# Altium PCB micromouse-PCB.PcbDoc
Units mil, origin at the board's own origin, x right, y up, seen from the top; angles counter-clockwise.
Board outline 4010 x 2775 mil, 2 copper layers (Top Layer, Bottom Layer); 8 components, 9 nets, 23 pads, 0 vias.
Unrouted connection lines stored in the file: 6.
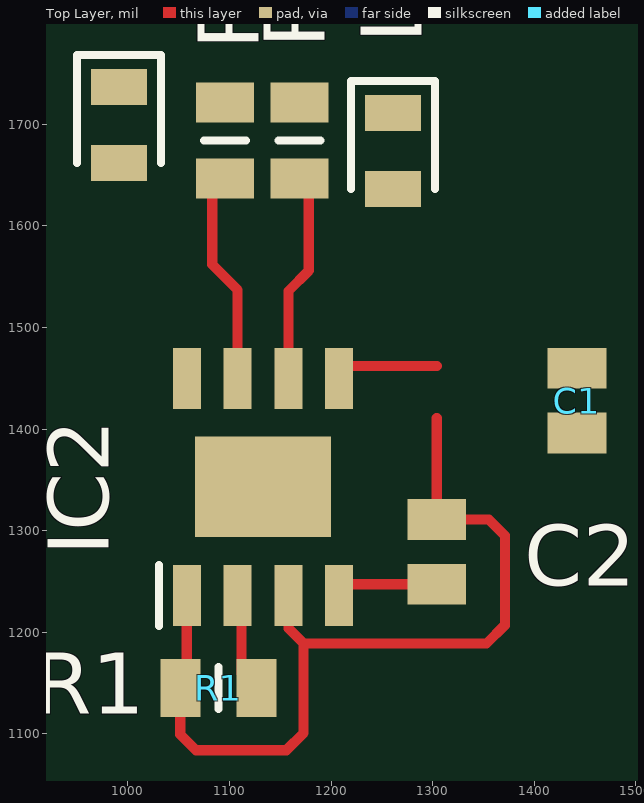
[diagram p0: Top Layer view]
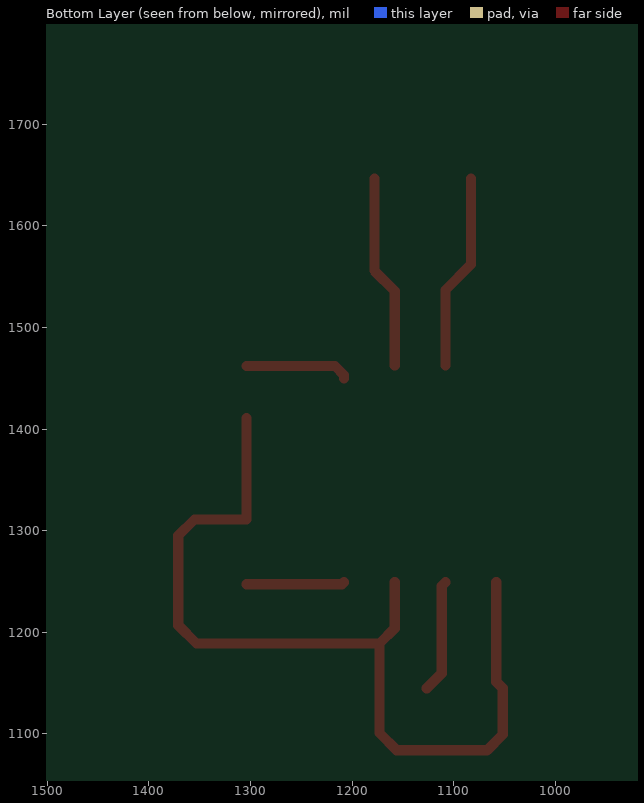
[diagram p1: Bottom Layer view, seen from below]

## Layer stack, top to bottom
Top Solder: solder mask 0.4, Solder Resist, Dk 3.5
Top Layer: signal copper 1.4
Dielectric 1: dielectric 12.6, FR-4, Dk 4.8
Bottom Layer: signal copper 1.4
Bottom Solder: solder mask 0.4, Solder Resist, Dk 3.5

## Board outline
0,0 4010,0 4010,2775 0,2775

## Design rules (kind name [scope] priority, off if disabled: settings)
Clearance [All] p1: gap=10 ignorepadtopadclearanceinfootprint=FALSE except(0: Arc-Hole Track-Hole SMDPad-Hole THPad-Hole Via-Hole Fill-Hole Poly-Hole Region-Hole Text-Hole)
PolygonConnect [All] p1: connectstyle=Relief reliefconductorwidth=10 reliefentries=4 polygonreliefangle="90 Angle" airgapwidth=10
RoomDefinition 1.power [InComponentClass('1.power')] p1: confinementstyle=ConfineIn formatcopy=TRUE lockcomponents=FALSE outline -2990,-1000 -990,-1000 -990,0 -2990,0
RoutingVias [All] p1: holewidth=28 width=50 viastyle="Through Hole" minholewidth=28 minwidth=50 maxholewidth=28 maxwidth=50
SolderMaskExpansion [All] p1: expansion=4
Width [All] p1: maxlimit=10 minlimit=10 preferedwidth=10
30 further rules are at their usual default settings.

## Components (designator, comment, footprint, x,y, rotation, side; value= is the part's Value field where it differs from the comment)
C1 "08055A101JAT2A" CAPC2012X94N 1442,1428 r270 top
C2 "08055A101JAT2A" CAPC2012X94N 1304,1279.23 r90 top
IC2 "TP4056" SOIC127P600X175-9N 1133,1343.24 r90 top
LED1 "150080BS75000" LEDC2012X80N 991,1699.6 r270 top
LED2 "150080BS75000" LEDC2012X80N 1261,1674 r270 top
R1 "CPF0805B100KE" RESC2012X65N 1089,1145 r0 top value=1.2k
R2 "CPF0805B100KE" RESC2012X65N 1095.6,1684 r90 top value=330
R3 "CPF0805B100KE" RESC2012X65N 1168.93,1684 r90 top value=330

## Footprints (in the part's own frame and the unit in brackets; to place one, negate y for a bottom-side part, rotate by r counter-clockwise, add the part's x,y. Pads: shape width x height; smd on the part's side, far side on the other; paste and mask are expansions set on the pad)
CAPC2012X94N [mm]
  rect 1.02x1.47 smd: 1(-0.81,0) 2(0.81,0)
  body extent -1,-0.63 1,0.63, height 0.94
LEDC2012X80N [mm]
  rect 0.9x1.4 smd: 1(-0.95,0) 2(0.95,0)
  silkscreen extent -1.75,-1.05 0.95,1.05, body extent -1,-0.62 1,0.63, height 0.8
RESC2012X65N [mm]
  rect 1x1.45 smd: 1(-0.95,0) 2(0.95,0)
  silkscreen extent 0,-0.53 0,0.53, body extent -1,-0.63 1,0.63, height 0.65
SOIC127P600X175-9N [mm]
  rect 1.525x0.7 smd: 1(-2.712,1.905) 2(-2.712,0.635) 3(-2.712,-0.635) 4(-2.712,-1.905) 5(2.712,-1.905) 6(2.712,-0.635) 7(2.712,0.635) 8(2.712,1.905)
  rect 2.513x3.402 smd: 9(0,0)
  silkscreen extent -3.47,2.61 -1.95,2.61, body extent -3,-2.45 3,2.45, height 1.75

## Part data
C1 C2: "Capacitor", Manufacturer_Name=AVX, Mouser Part Number=581-08055A101J, RS Part Number=0391000P, Allied_Number=70474488, Allied Price/Stock=https://www.alliedelec.com/avx-08055a101jat2a/70474488/, Datasheet Link=https://componentsearchengine.com/Datasheets/1/06031A100FAT2A.pdf, Height=0.94mm, Manufacturer_Part_Number=08055A101JAT2A, Mouser Price/Stock=https://www.mouser.com/Search/Refine.aspx?Keyword=581-08055A101J, RS Price/Stock=http://uk.rs-online.com/web/p/products/0391000P
IC2: "Integrated Circuit", Manufacturer_Name="NanJing Top Power", Datasheet Link=https://dlnmh9ip6v2uc.cloudfront.net/datasheets/Prototyping/TP4056.pdf, Height=1.75mm, Manufacturer_Part_Number=TP4056
LED1 LED2: "LED", Manufacturer_Name="Wurth Elektronik", Mouser Part Number=710-150080BS75000, RS Part Number=8154228P, Datasheet Link=https://katalog.we-online.com/led/datasheet/150080BS75000.pdf, Height=0.8mm, Manufacturer_Part_Number=150080BS75000, Mouser Price/Stock=https://www.mouser.com/Search/Refine.aspx?Keyword=710-150080BS75000, RS Price/Stock=http://uk.rs-online.com/web/p/products/8154228P
R1 R2 R3: "Resistor", Manufacturer_Name="TE Connectivity", Mouser Part Number=279-CPF0805B100KE, RS Part Number=6662673, Allied_Number=70286772, Allied Price/Stock=https://www.alliedelec.com/te-connectivity-cpf0805b100ke/70286772/, Datasheet Link=http://docs-europe.electrocomponents.com/webdocs/13d1/0900766b813d116f.pdf, Height=0.65mm, Manufacturer_Part_Number=CPF0805B100KE, Mouser Price/Stock=https://www.mouser.com/Search/Refine.aspx?Keyword=279-CPF0805B100KE, RS Price/Stock=https://uk.rs-online.com/web/p/products/6662673

## Nets (pads, with @x,y where several pads share a name; then routed paths per layer and width w, separated by ;. In a path a pad name is that pad's centre, name@x,y a point inside that pad or via, vN(x,y) a via of type N, cw(c..) or ccw(c..) an arc to the next point about the centre after c; other vN are vias at no path point)
GND: C1.2 C2.2 IC2.1 IC2.3 R1.1 | length 909
  Top Layer w10: IC2.1@1058,1249.23 1058,1151.4 R1.1 1051.6,1099.4 1067,1084 1156,1084 1173,1101 1173,1189 ; IC2.3@1158,1249.23 1158,1204 1173,1189 ; 1304,1411.11 C2.2 1355.12,1311.12 1371,1295.24 1371,1207 1353,1189 1173,1189
NetC1_1: C1.1 IC2.5 | length 103
  Top Layer w10: IC2.5 1208,1453.35 1216.78,1462.13 1304,1462.13
NetC2_1: C2.1 IC2.4 | length 96.8
  Top Layer w10: IC2.4@1208,1249.23 1209.89,1247.34 C2.1
NetIC2_2: IC2.2 R1.2 | length 111.9
  Top Layer w10: IC2.2@1108,1249.23 1111.72,1245.51 1111.72,1159.69 R1.2
NetIC2_6: IC2.6 R3.1 | length 192.1
  Top Layer w10: IC2.6@1158,1462.77 1158,1536 1178,1556 R3.1@1178,1646.6
NetIC2_7: IC2.7 R2.1 | length 194.2
  Top Layer w10: R2.1@1083,1646.6 1083,1562 1108,1537 IC2.7@1108,1462.77
NetLED1_1: LED1.1 R2.2
NetLED2_1: LED2.1 R3.2
VCC: IC2.8 LED1.2 LED2.2
pads on no net: IC2.9